# Altium PCB Motoransteurung_v1.PcbDoc
Units mm, origin at the board's own origin, x right, y up, seen from the top; angles counter-clockwise.
Board outline 63 x 33.02 mm, 2 copper layers (Top Layer, Bottom Layer); 9 components, 8 nets, 25 pads, 0 vias.
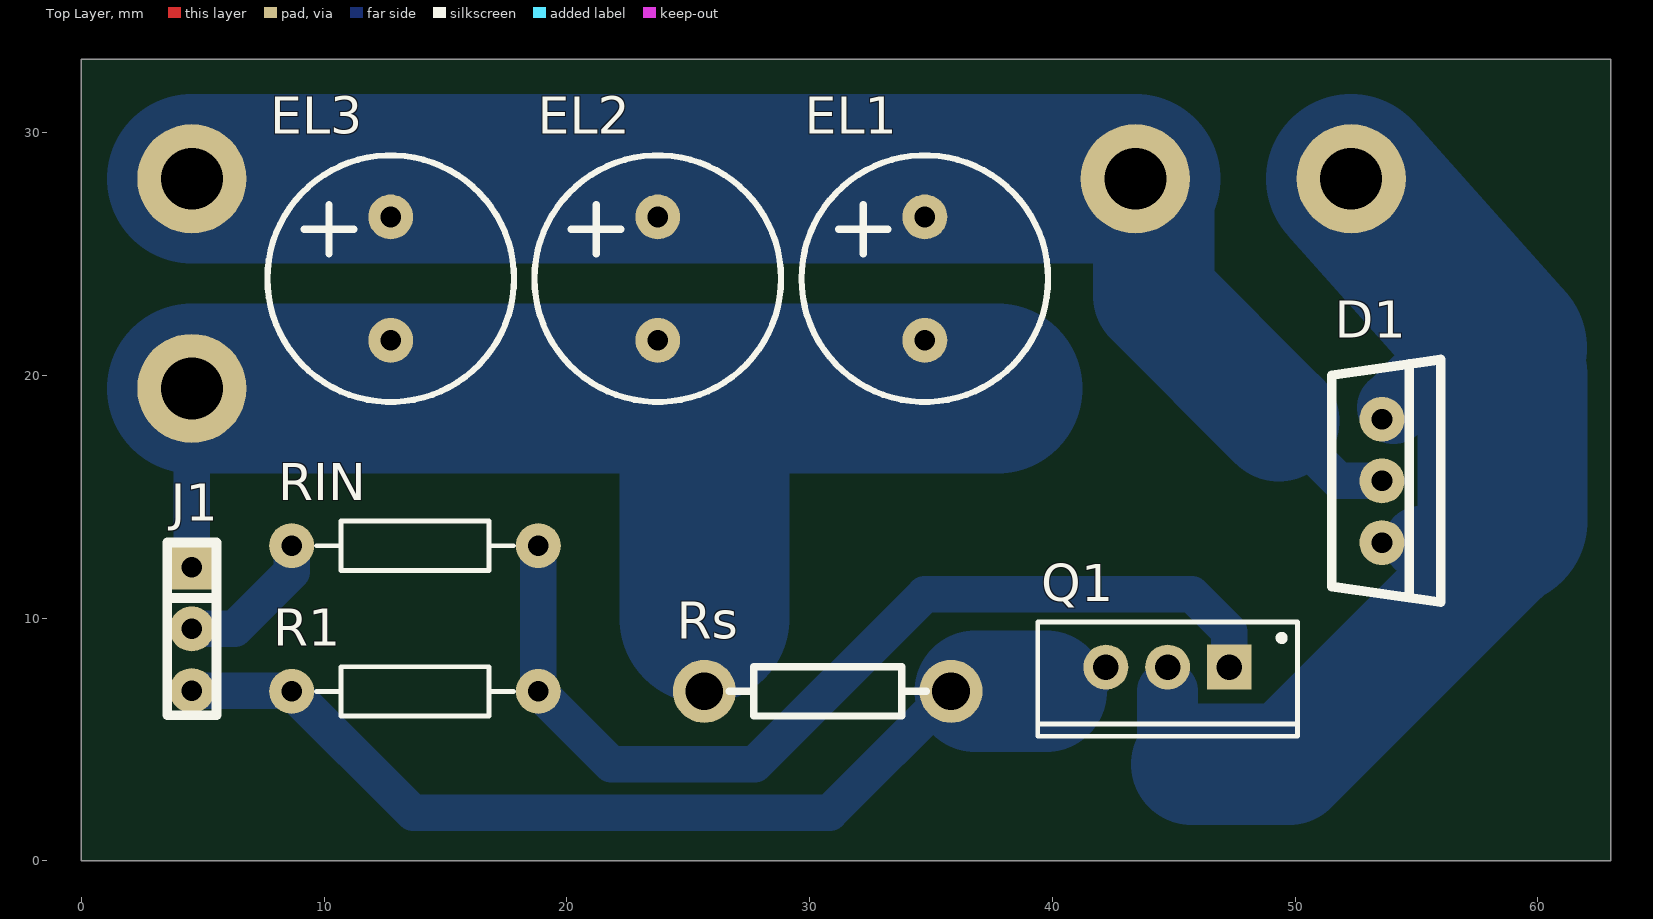
[diagram p0: Top Layer view]
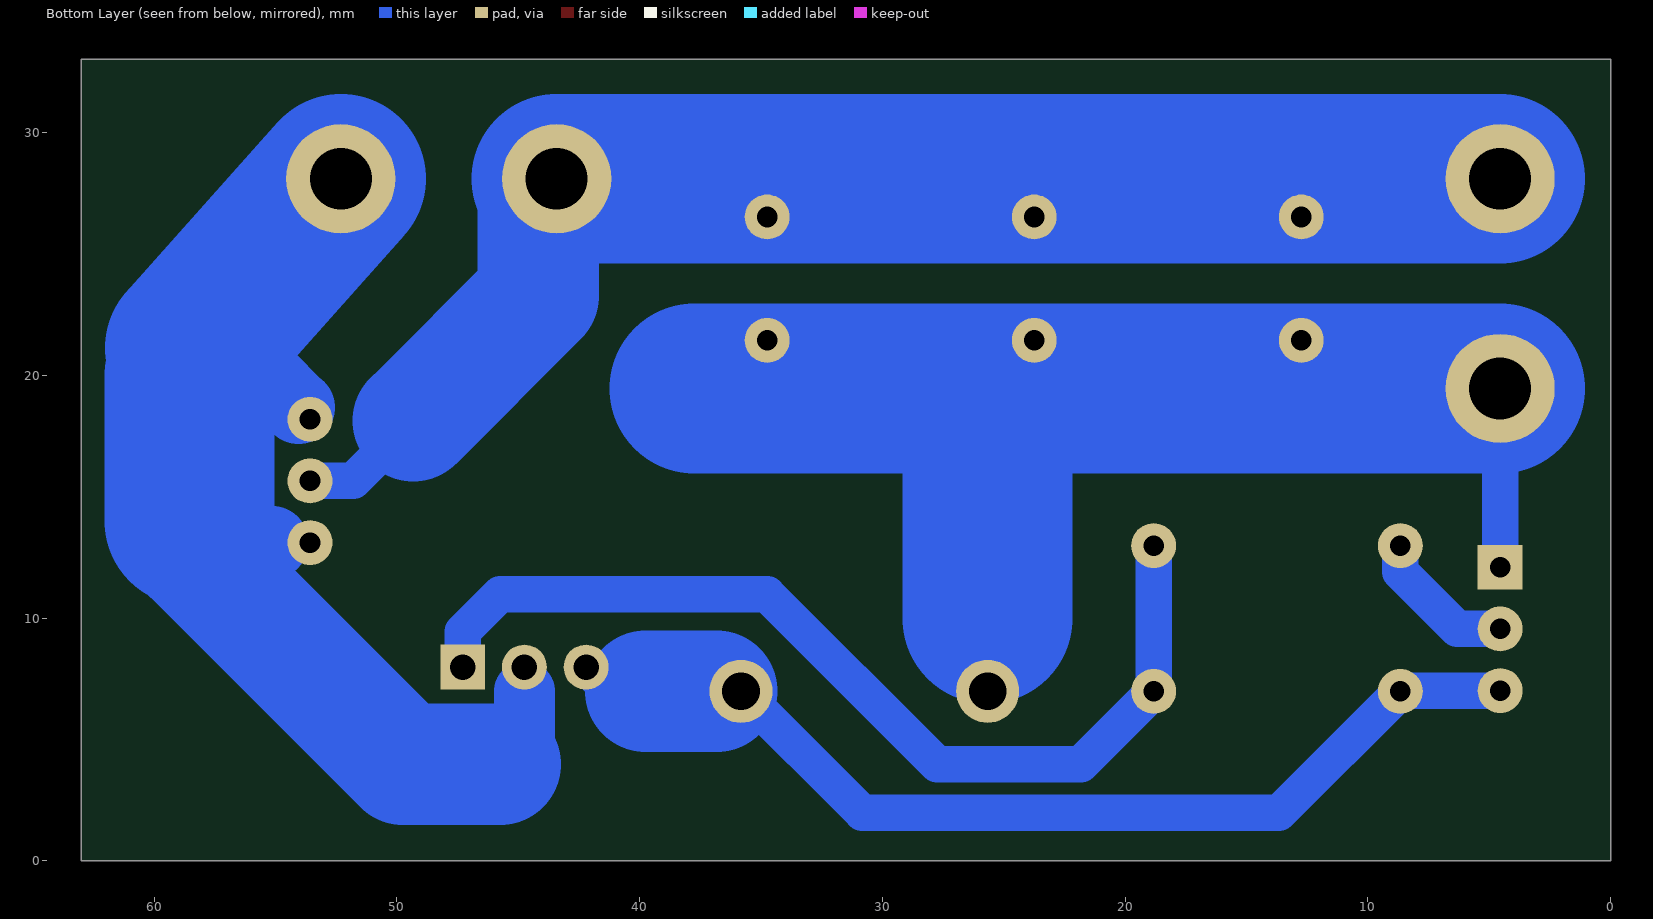
[diagram p1: Bottom Layer view, seen from below]

## Layer stack, top to bottom
Top Solder: solder mask 0.0102, Solder Resist, Dk 3.5
Top Layer: signal copper 0.0356
Dielectric1: dielectric 0.32, FR-4, Dk 4.8
Bottom Layer: signal copper 0.0356
Bottom Solder: solder mask 0.0102, Solder Resist, Dk 3.5

## Board outline
0,0 0,33.02 63,33.02 63,0

## Design rules (kind name [scope] priority, off if disabled: settings)
Clearance Clearance_1 [Inpolygon vs Inpolygon] p1: gap=0.75 ignorepadtopadclearanceinfootprint=FALSE except(0: Arc-Hole Track-Hole SMDPad-Hole THPad-Hole Via-Hole Fill-Hole Poly-Hole Region-Hole Text-Hole)
Clearance [All] p2: gap=0.38 ignorepadtopadclearanceinfootprint=FALSE except(0: Arc-Hole Track-Hole SMDPad-Hole THPad-Hole Via-Hole Fill-Hole Poly-Hole Region-Hole Text-Hole)
HoleSize [All] p1: absolutevalues=TRUE maxlimit=2160.256 minlimit=0.75 maxpercent=80.000 minpercent=20.000
MinimumAnnularRing [All] p1: minimumring=0.5
PolygonConnect [All] p1: connectstyle=Relief reliefconductorwidth=0.5 reliefentries=4 polygonreliefangle="90 Angle" airgapwidth=0.254
RoutingVias [All] p1: holewidth=0.85 width=1.85 viastyle="Through Hole" minholewidth=0.75 minwidth=1.75 maxholewidth=0.95 maxwidth=1.95
SolderMaskExpansion [All] p1: expansion=0.102
Width [All] p1: maxlimit=10 minlimit=0.38 preferedwidth=1.5
29 further rules are at their usual default settings.

## Components (designator, comment, footprint, x,y, rotation, side; value= is the part's Value field where it differs from the comment)
D1 "Schottky" TO-220V 53.578,15.652 r270 top
EL1 "ELKO" RB-.2/.4 34.746,23.984 r90 top
EL2 "ELKO" RB-.2/.4 23.746,23.984 r90 top
EL3 "ELKO" RB-.2/.4 12.746,23.984 r90 top
J1 "CON3" Sip-3 4.556,9.556 r270 top
Q1 "IRFZ34N" TO-220AB 44.746,7.984 r180 top
R1 "R1" Axial-0.4#1 13.746,6.984 r180 top value=100K
RIN "Rin" Axial-0.4#1 13.746,12.984 r0 top value=125
Rs "RES" Axial-0.4#2 30.746,6.984 r0 top value=0.039

## Footprints (in the part's own frame and the unit in brackets; to place one, negate y for a bottom-side part, rotate by r counter-clockwise, add the part's x,y. Pads: shape width x height; smd on the part's side, far side on the other; paste and mask are expansions set on the pad)
Axial-0.4#1 [mm] "Axial Device, Thru-Hole; 2 Leads; 0.4 in Pin Spacing"
  round 1.85 hole 0.85: 1(-5.08,0) 2(5.08,0)
  silkscreen extent -4.06,-1.02 4.06,1.02
Axial-0.4#2 [mm]
  round 2.6 hole 1.55: 1(-5.08,0) 2(5.08,0)
  silkscreen extent -4.06,-1.02 4.06,1.02
RB-.2/.4 [mm]
  round 1.85 hole 0.85: 1(2.54,0) 2(-2.54,0)
  silkscreen extent -5.08,-5.08 5.08,5.08
Sip-3 [mm]
  rect 1.85x1.85 hole 0.85: 1(-2.54,0)
  round 1.85 hole 0.85: 2(0,0) 3(2.54,0)
  silkscreen extent -3.56,-1.02 3.56,1.02
TO-220AB [mm] "TO, Thru-Hole, Vertical, Heatsink Mounted; 3 In-Line Leads; Pitch 2.54 mm"
  rect 1.85x1.85 hole 1.05: 1(-2.54,0)
  round 1.85 hole 1.05: 2(0,0) 3(2.54,0)
  silkscreen extent -5.35,-1.85 5.35,2.85, body extent -5.4,-1.9 5.4,2.9, height 19.3
TO-220V [mm]
  round 1.85 hole 0.85: 1(-2.54,0) 2(2.54,0) 3(0,0)
  silkscreen extent -5,-2.07 5,2.42

## Part data
EL1 EL2 EL3: "Elko"
J1: "Stecker"
Q1: "HEXFET Power MOSFET", ComponentLink1Description="Manufacturer Link", ComponentLink1URL=http://www.irf.com/, ComponentLink2Description=Datasheet, ComponentLink2URL=http://www.irf.com/product-info/datasheets/data/irfz34n.pdf, DatasheetVersion=Aug-1997, LatestRevisionDate=17-Jul-2002, LatestRevisionNote="Re-released for DXP Platform.", Note="Pin 2 is electrically connected to pin 4.", PackageDescription="TO, Thru-Hole, Vertical, Heatsink Mounted; 3 In-Line Leads; Pitch 2.54 mm", PackageReference=TO-220AB, PackageVersion=Feb-1997, Published=8-Jun-2000, Publisher="Altium Limited"
R1 RIN: library part RES, "Widerstand"
Rs: "Widerstand"

## Free pads (board coordinates)
  round 4.5 hole 2.55: 1(52.308,28.098) 2(43.418,28.098) 3(4.556,28.098) 4(4.556,19.462)

## Nets (pads, with @x,y where several pads share a name; then routed paths per layer and width w, separated by ;. In a path a pad name is that pad's centre, name@x,y a point inside that pad or via, vN(x,y) a via of type N, cw(c..) or ccw(c..) an arc to the next point about the centre after c; other vN are vias at no path point)
24V: 
GND: 
Net_1: 
NetJ1_1: 
NetJ1_3: 
NetL1_1: 
ugs: 
uq: 
pads on no net: D1.1 D1.2 D1.3 EL1.1 EL1.2 EL2.1 EL2.2 EL3.1 EL3.2 J1.1 J1.2 J1.3 Q1.1 Q1.2 Q1.3 R1.1 R1.2 RIN.1 RIN.2 Rs.1 Rs.2
copper on no net: | length 236
  Bottom Layer w1.5: 4.556,7.016 8.634,7.016 8.666,6.984 13.666,1.984 30.826,1.984 35.826,6.984 ; 4.556,9.556 6.318,9.556 8.666,11.904 8.666,12.984 ; 4.556,12.096 4.556,19.462 ; 18.826,12.984 18.826,6.984 21.826,3.984 27.746,3.984 34.746,10.984 45.746,10.984 47.286,9.444 47.286,7.984 ; 23.352,19.462 23.666,19.148 ; 41.206,6.984 42.206,7.984 ; 43.418,28.098 44.18,27.336 ; 49.323,18.129 51.8,15.652 53.578,15.652 ; 55.37,19.984 58.547,19.984 ; 57.652,13.112 58.547,14.007 ; 58.524,12.762 58.524,13.984 ; 58.524,19.984 58.524,21.12
  Bottom Layer w2.5: 44.746,3.984 44.746,6.984
  Bottom Layer w3: 54.058,18.672 55.37,19.984 ; 55.136,13.112 57.652,13.112
  Bottom Layer w5: 36.826,6.984 39.746,6.984 ; 44.18,27.336 44.18,23.272 49.323,18.129 ; 45.746,3.984 49.746,3.984 51.94,6.178 58.524,12.762
  Bottom Layer w7: 4.556,19.462 23.352,19.462 37.746,19.462 ; 4.556,28.098 23.746,28.098 43.418,28.098 ; 25.666,9.984 25.666,15.904 ; 52.308,28.098 58.524,21.12 ; 58.547,14.007 58.547,19.984

## Silkscreen, mask and mechanical layers (free items; w line width, h text height)
Bemaßung:
  lines w0.254: -4.508,1.524 -4,0 ; -4.508,31.476 -4,33 ; -4.254,0 -3.746,0 ; -4.254,33 -3.746,33 ; -4,11.396 -4,0 ; -4,21.604 -4,33 ; -3.492,1.524 -4,0 ; -3.492,31.476 -4,33 ; 0,-4.254 0,-3.746 ; 1.524,-4.508 0,-4 ; 1.524,-3.492 0,-4 ; 26.396,-4 0,-4 ; 36.604,-4 63,-4 ; 61.476,-4.508 63,-4 ; 61.476,-3.492 63,-4 ; 63,-4.254 63,-3.746
  text "33 (mm)" at -3.086,11.65 h1.52 r90
  text "63 (mm)" at 26.65,-4.914 h1.52
Kontur:
  the board outline again, w0.4